# EAGLE board module_i2c (EAGLE 7.3.0)
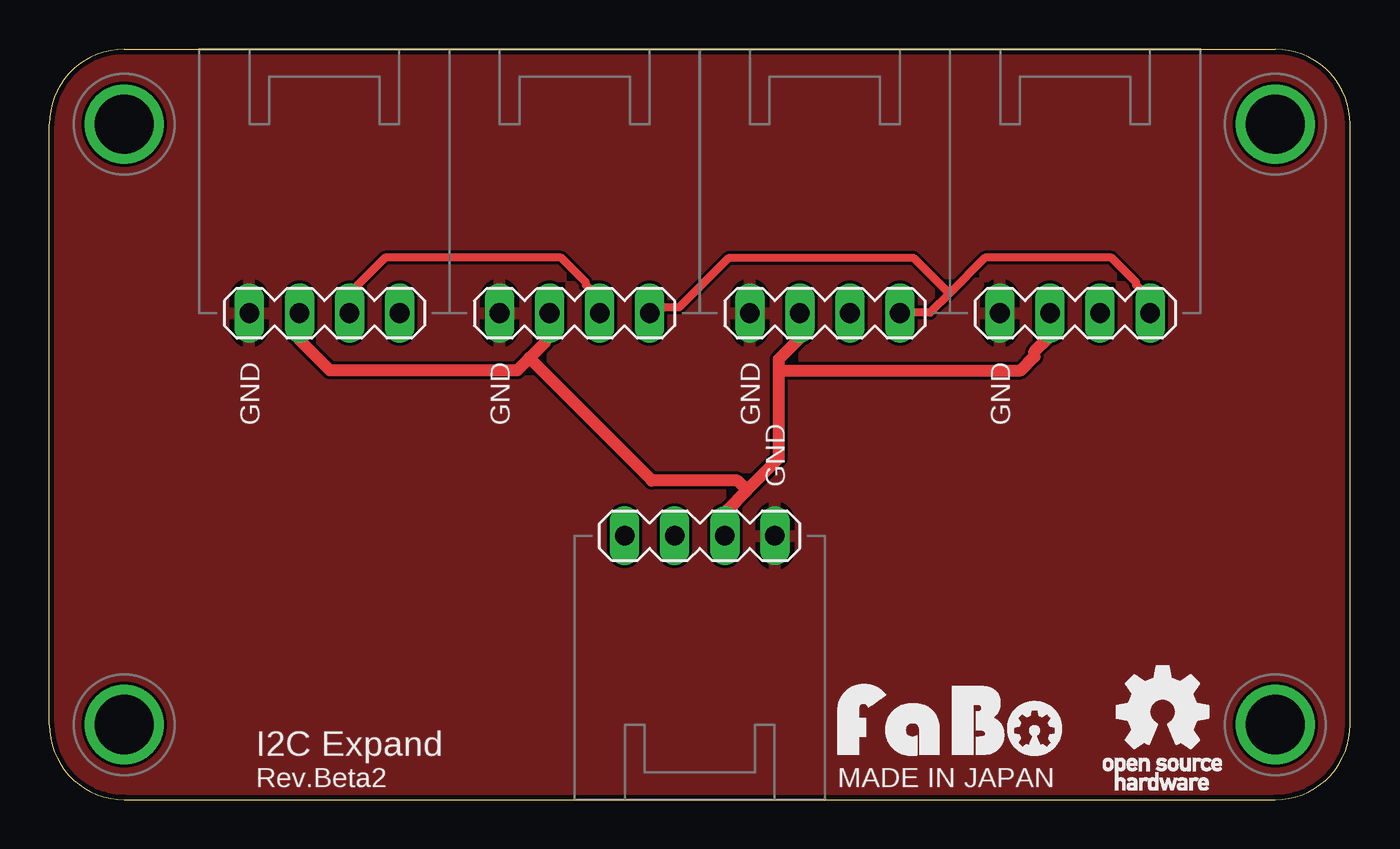
[diagram p0: board, top side]
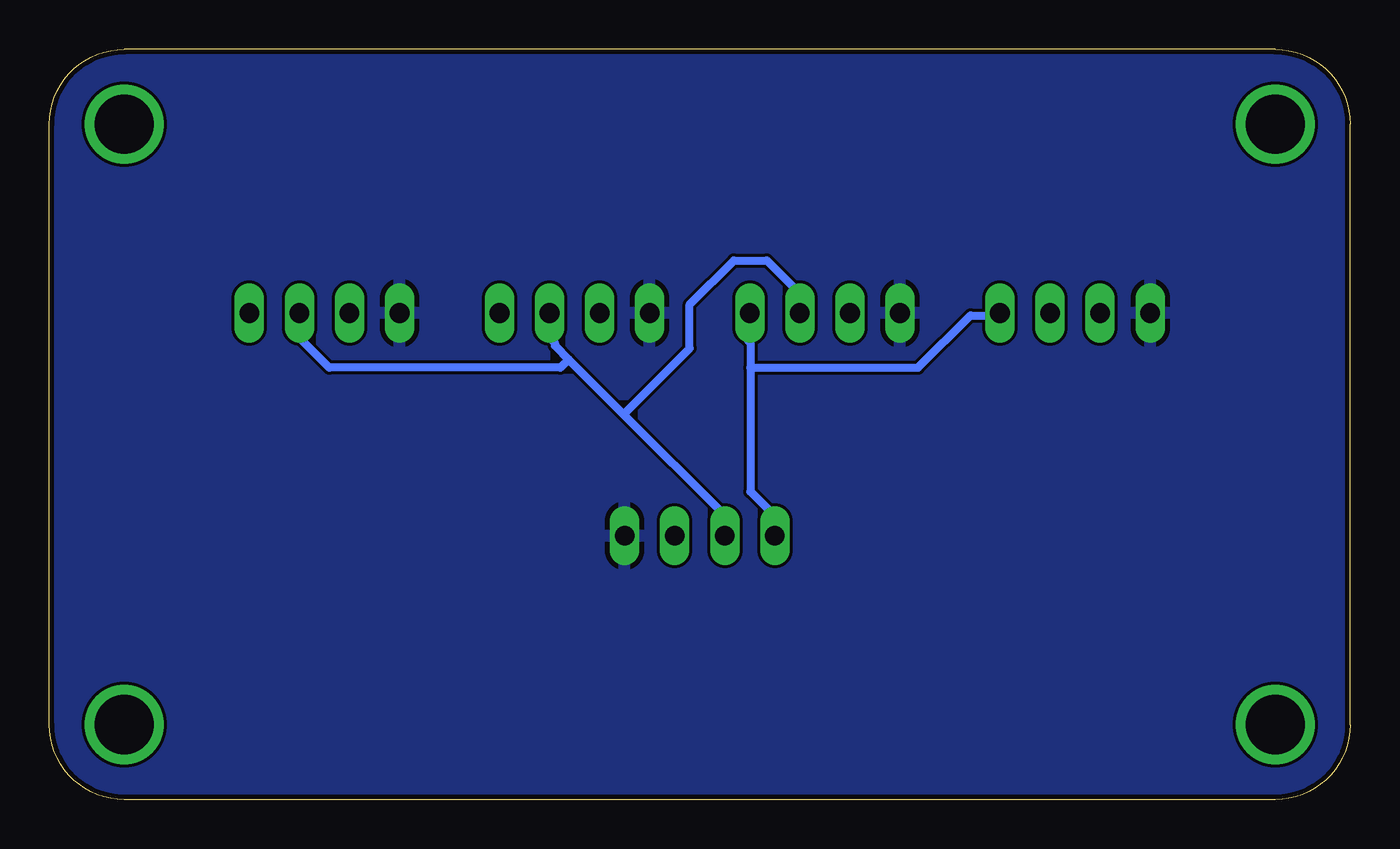
[diagram p1: board, bottom side, seen from below]

Size 66.04 x 38.1 mm. Coordinates in mm from the lower left corner, seen from the top.
Outline: 3.81,0 62.23,0 arc90 66.04,3.81 66.04,34.29 arc90 62.23,38.1 3.81,38.1 arc90 0,34.29 0,3.81 arc90 3.81,0
Copper layers (1*16): Top 0.035mm / dielectric 1.5mm / Bottom 0.035mm
Design rules "Elecrow_2-layer_eagle_rule": minimum track width 6mil, minimum drill 12mil, track to track 6mil, track to pad 6mil, pad to pad 6mil, via to via 6mil, smd to smd 0mil, copper to edge 10mil, drill to drill 10mil, minimum pad ring 10mil, minimum via ring 6mil, stop-mask expansion 2mil, vias tented up to drill 100mil, thermal gap 10mil
Net classes: 0 default: width 0.406 mm; 1 PWR: width 0.61 mm

## Footprints (pad centres in the part's own frame; a part is rotated, then mirrored left to right if it is on the bottom)
BRICK_I2C_CONNECTOR = drill 1 long: GND -3.81,0; SCL 3.81,0; SDA 1.27,0; VCC -1.27,0
SCREWPAD_3MM = drill 3 pad 3.81: 1 0,0

## Placement (x,y rotation side)
SV1  [BRICK_I2C_CONNECTOR]  33.02,13.4 180 top
SV2  [BRICK_I2C_CONNECTOR]  13.97,24.7 0 top
SV3  [BRICK_I2C_CONNECTOR]  26.67,24.7 0 top
SV4  [BRICK_I2C_CONNECTOR]  39.37,24.7 0 top
SV5  [BRICK_I2C_CONNECTOR]  52.07,24.7 0 top
U$7  [SCREWPAD_3MM]  3.81,3.81 0 top
U$8  [SCREWPAD_3MM]  3.81,34.29 0 top
U$9  [SCREWPAD_3MM]  62.23,34.29 0 top
U$10  [SCREWPAD_3MM]  62.23,3.81 0 top
U$11  [LOGO_FABO_M]  45.72,2.22 0 top
U$12  [LOGO_OSHW_T_M]  56.52,4.45 0 top

## Library data of the parts
SV1-SV5 U$7-U$10 U$12 = gclue
U$11 = FaBo

## Nets
GND [PWR]: SV1.GND SV2.GND SV3.GND SV4.GND SV5.GND
SCL: SV1.SCL SV2.SCL SV3.SCL SV4.SCL SV5.SCL
SDA: SV1.SDA SV2.SDA SV3.SDA SV4.SDA SV5.SDA
VCC [PWR]: SV1.VCC SV2.VCC SV3.VCC SV4.VCC SV5.VCC

## Tracks (layer width: path | path; a pad name or v marks a point on that pad's centre or on a via)
GND
  pour Top: -1.27,-1.27 67.31,-1.27 67.31,39.37 -1.27,39.37
  pour Bottom: -1.27,-1.27 67.31,-1.27 67.31,39.37 -1.27,39.37
SCL
  Top 0.406: 45.68,25.7 47.5,27.52 53.92,27.52 55.18,26.26 55.18,26.12 55.88,25.43 SV5.SCL | 45.68,25.7 44.7,24.73 43.31,24.73 SV4.SCL | 45.68,25.7 43.87,27.52 34.51,27.52 31.99,25.01 30.87,25.01 30.59,24.73 SV3.SCL
  Bottom 0.406: 30.45,21.93 30.45,23.19 30.59,23.33 30.59,24.59 SV3.SCL | 30.45,21.93 30.45,15.65 29.34,14.53 29.34,13.41 SV1.SCL | 30.45,21.93 21.93,21.93 19.28,24.59 17.88,24.59 SV2.SCL
SDA
  Top 0.406: SV3.SDA 27.94,25.43 27.24,26.12 27.24,26.26 25.98,27.52 17.04,27.52 15.37,25.84 15.37,24.73 SV2.SDA
  Bottom 0.406: 39.67,22.35 40.37,23.05 40.37,23.19 40.51,23.33 40.51,24.59 SV4.SDA | 39.67,22.35 36.88,19.56 | 36.88,19.56 31.85,14.53 31.85,13.41 SV1.SDA | 39.67,22.35 40.09,21.93 51.83,21.93 53.23,23.33 53.23,24.59 SV5.SDA | SV3.SDA 27.94,25.7 29.62,27.38 31.29,27.38 33.53,25.15 33.53,22.91 36.88,19.56
VCC
  Top 0.61: 24.38,22.42 25.15,23.19 25.15,23.33 25.29,23.47 25.29,24.59 SV3.VCC | 24.38,22.42 23.75,21.79 14.25,21.79 12.71,23.33 12.71,24.59 SV2.VCC | 35.41,15.72 37.02,17.32 37.02,21.79 | 35.41,15.72 34.37,14.67 34.37,13.41 SV1.VCC | 37.02,21.79 37.02,22.35 38.14,23.47 38.14,24.59 SV4.VCC | 37.02,21.79 49.31,21.79 50.01,22.49 50.01,22.77 50.71,23.47 50.71,24.59 SV5.VCC | 24.38,22.42 30.59,16.2 34.92,16.2 35.41,15.72

## Text on the board
tPlace: GND | GND | GND | GND | GND | I2C Expand | Rev.Beta2 | MADE IN JAPAN